# Altium PCB PCB.pcbdoc
Units mm, origin at the board's own origin, x right, y up, seen from the top; angles counter-clockwise.
Board outline 125.65 x 132.25 mm, 2 copper layers (Top Layer, Bottom Layer); 70 components, 68 nets, 266 pads, 45 vias.
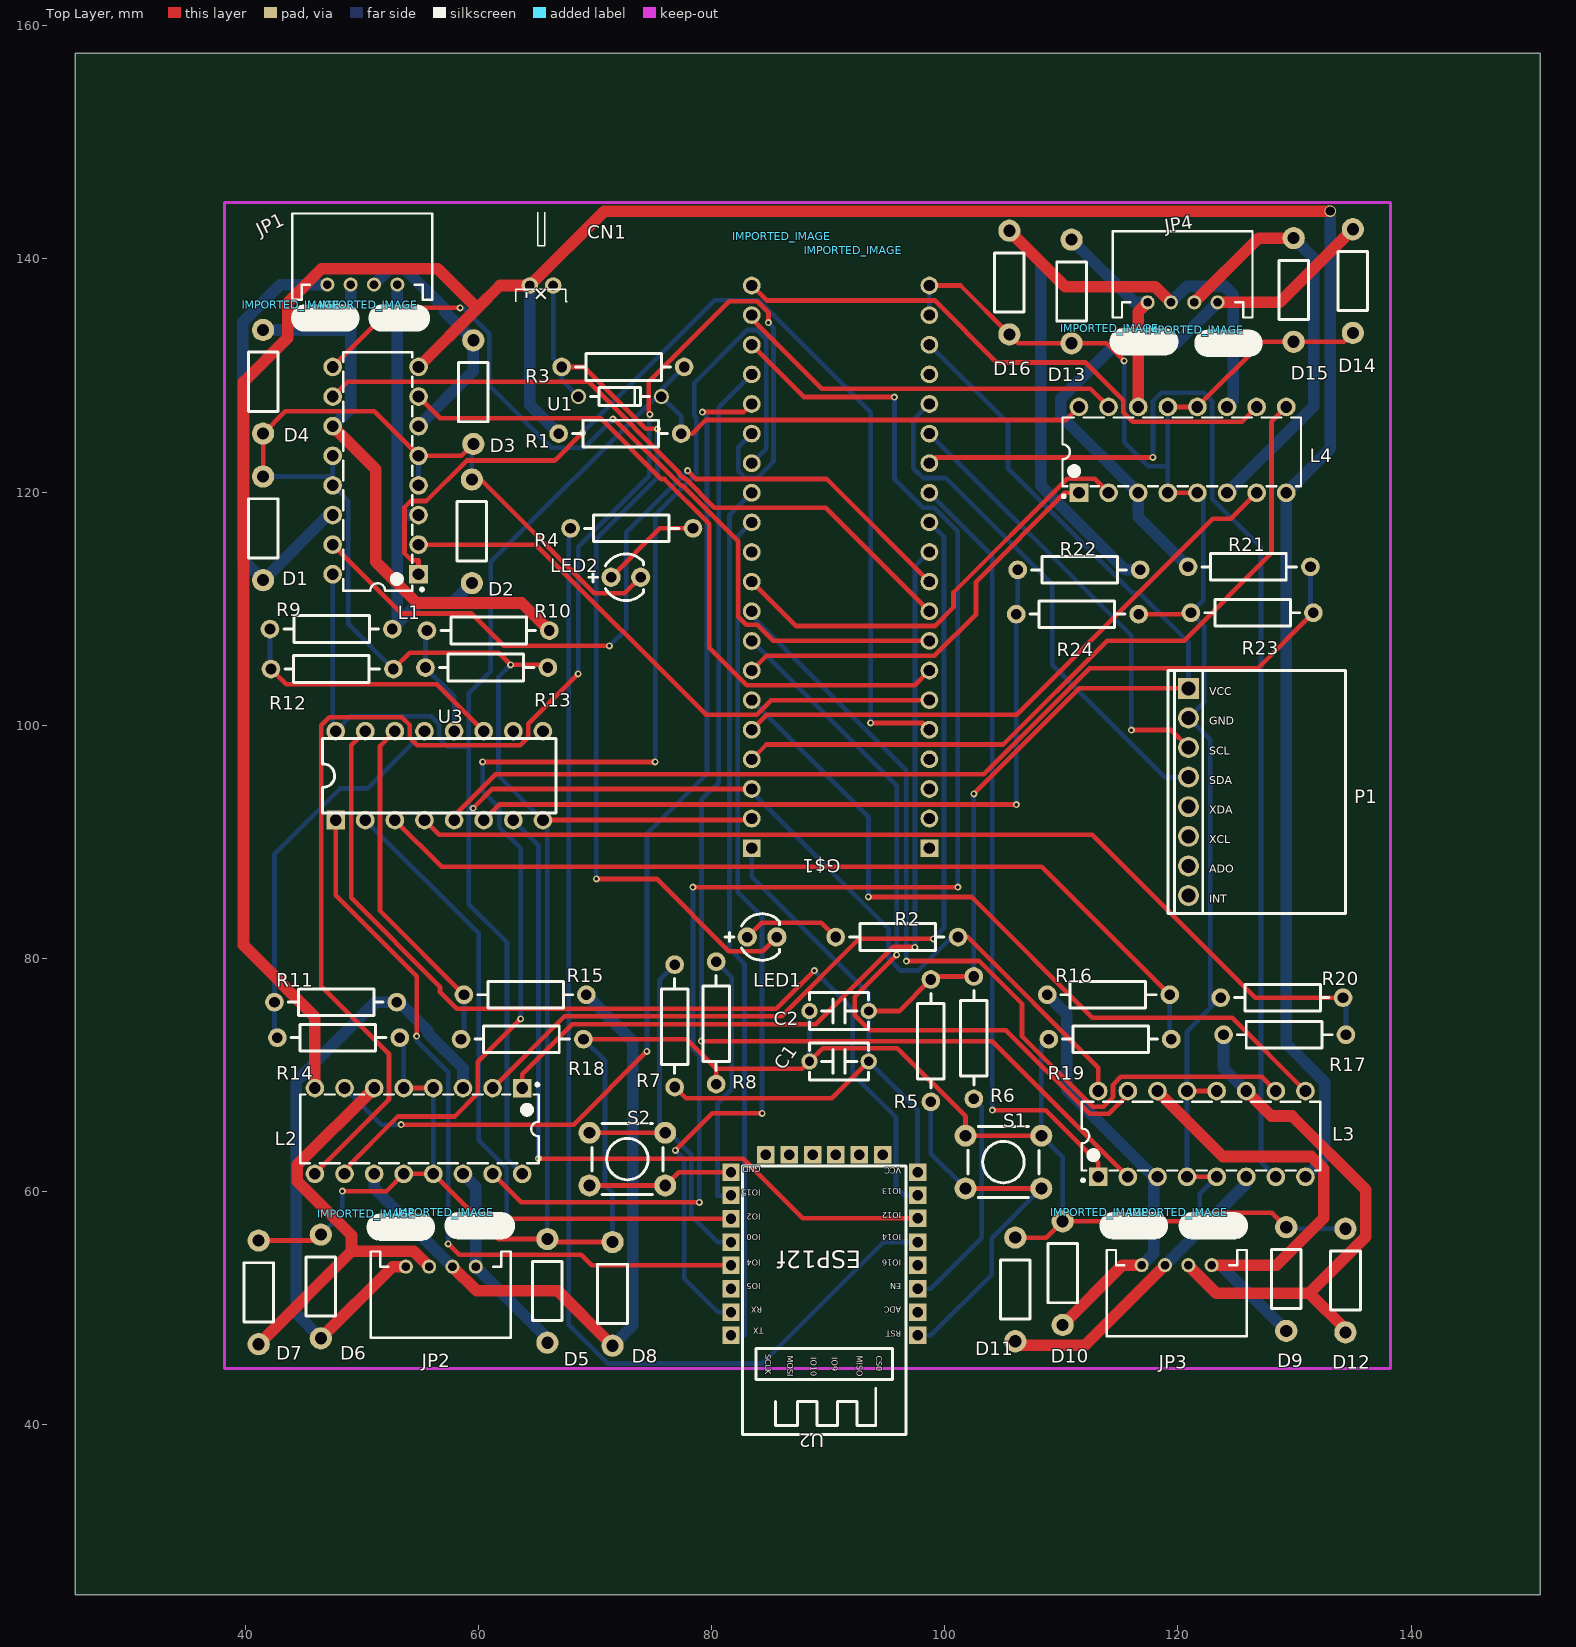
[diagram p0: Top Layer view]
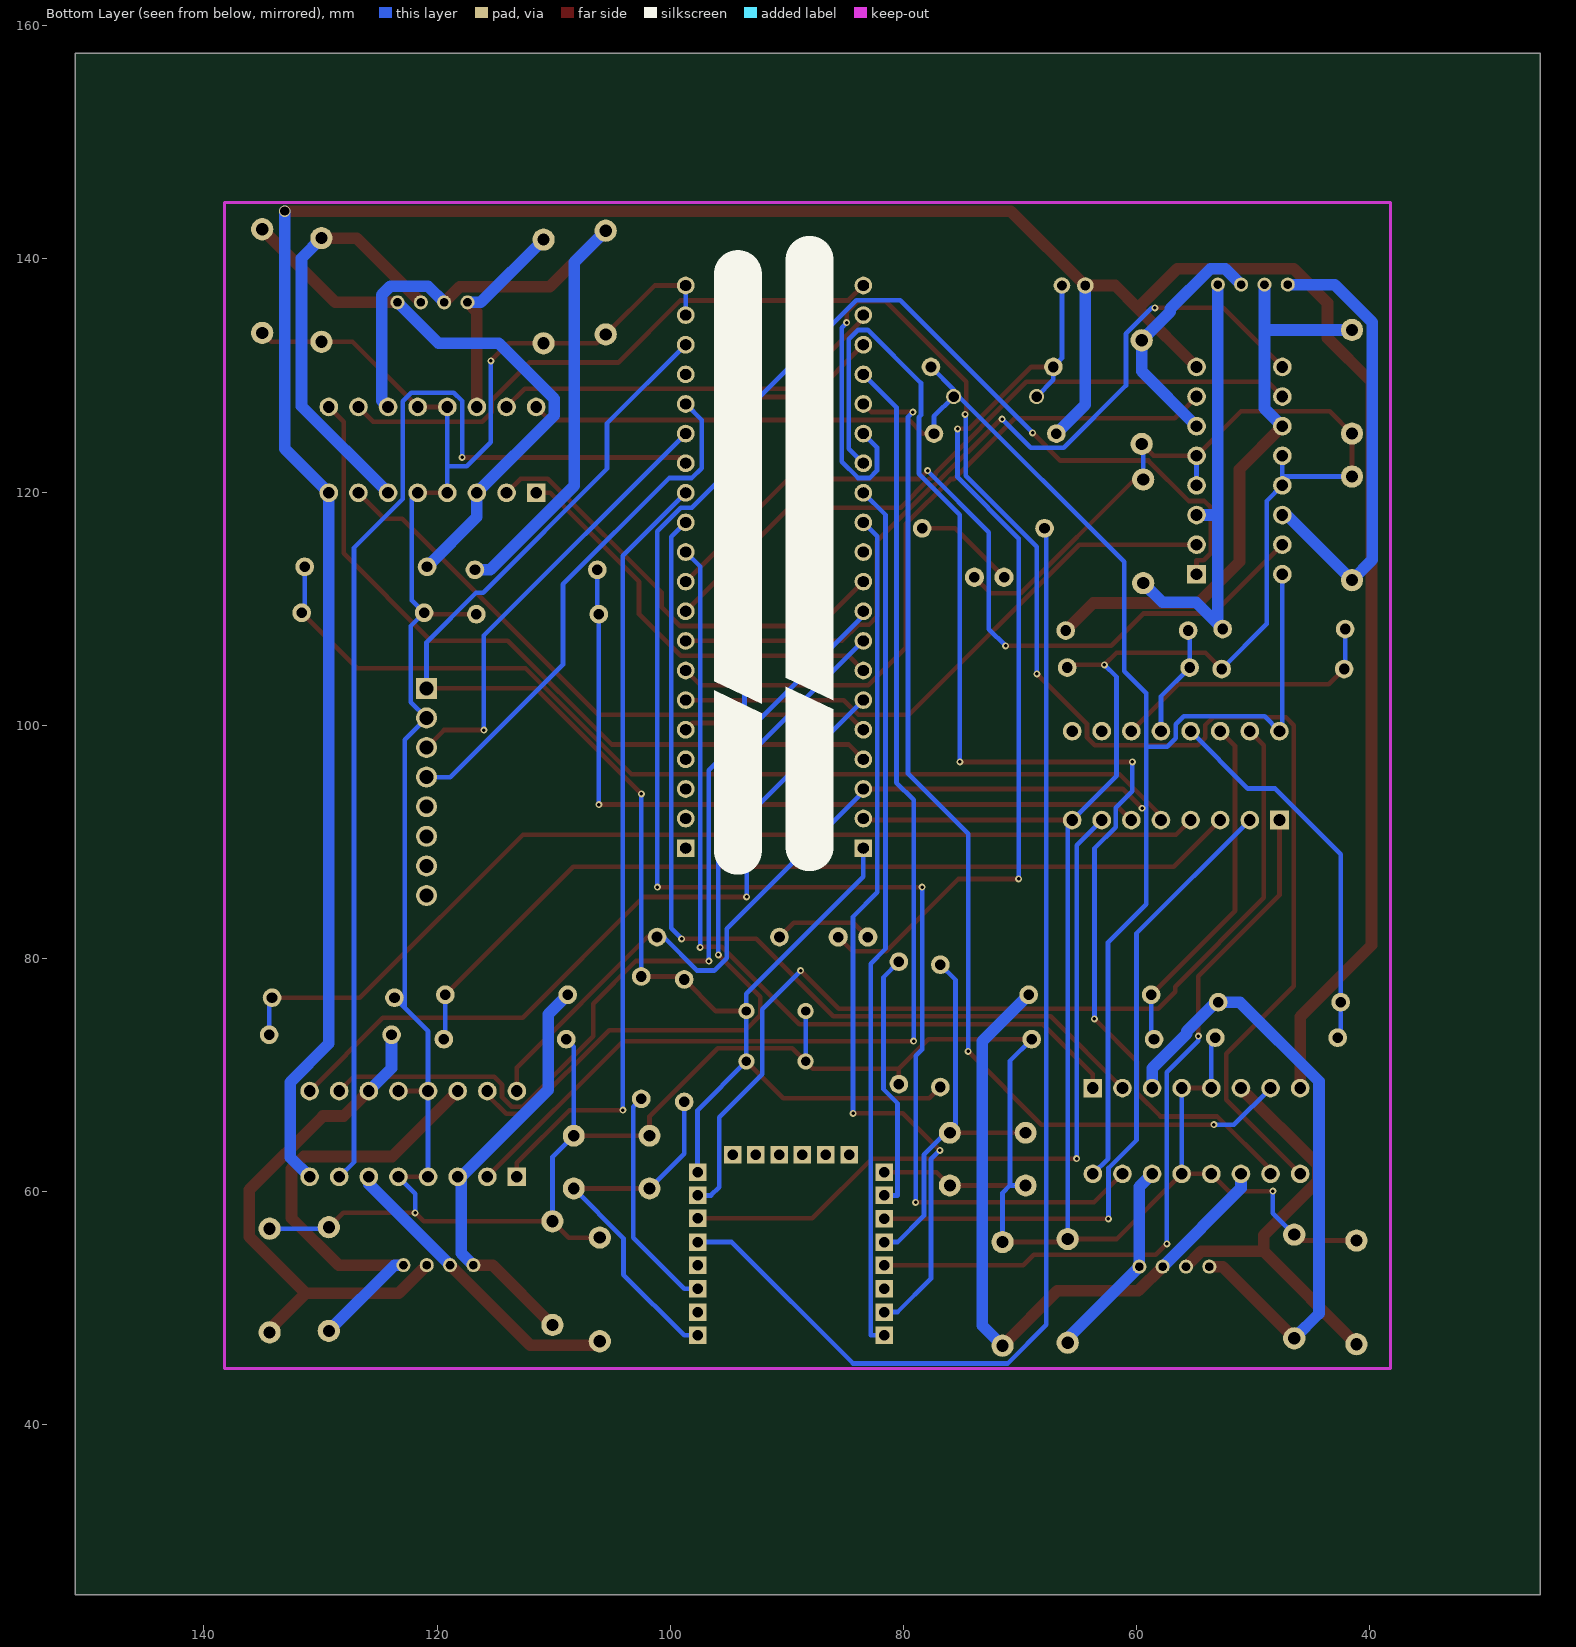
[diagram p1: Bottom Layer view, seen from below]

## Layer stack, top to bottom
Top Layer: signal copper (thickness not stored)
Dielectric: dielectric 0.32, FR-4, Dk 4.8
Bottom Layer: signal copper (thickness not stored)

## Board outline
151.054,25.4 25.4,25.4 25.4,157.651 151.054,157.651

## Components (designator, comment, footprint, x,y, rotation, side; value= is the part's Value field where it differs from the comment)
C1 "10uF" CAP-TH_L5.0-W2.5-P5.08-D0.7 90.932,71.164 r0 top
C2 "100nF" CAP-TH_L5.0-W2.5-P5.08-D0.7 90.932,75.482 r0 top
CN1 "JST_2PIN-THM-RA" JST-PH-2-THM-RA 65.405,137.712 r0 top
D1 "1N4001-G" SEEED-DO-41 41.529,116.884 r270 top
D2 "1N4001-G" SEEED-DO-41 59.436,116.63 r270 top
D3 "1N4001-G" SEEED-DO-41 59.563,128.568 r90 top
D4 "1N4001-G" SEEED-DO-41 41.529,129.457 r90 top
D5 "1N4001-G" SEEED-DO-41 65.913,51.479 r270 top
D6 "1N4001-G" SEEED-DO-41 46.482,51.86 r270 top
D7 "1N4001-G" SEEED-DO-41 41.148,51.352 r270 top
D8 "1N4001-G" SEEED-DO-41 71.501,51.225 r270 top
D9 "1N4001-G" SEEED-DO-41 129.286,52.495 r270 top
D10 "1N4001-G" SEEED-DO-41 110.109,53.003 r270 top
D11 "1N4001-G" SEEED-DO-41 106.045,51.606 r270 top
D12 "1N4001-G" SEEED-DO-41 134.366,52.368 r270 top
D13 "1N4001-G" SEEED-DO-41 110.871,137.204 r90 top
D14 "1N4001-G" SEEED-DO-41 135.001,138.093 r90 top
D15 "1N4001-G" SEEED-DO-41 129.921,137.331 r90 top
D16 "1N4001-G" SEEED-DO-41 105.537,137.966 r90 top
G$1 "BLUEPILL" BLUEPILL 98.679,89.452 r180 top
IMPORTED_IMAGE "IMPORTED_IMAGE" IMPORTED_IMAGE 92.166,140.725 r0 top
IMPORTED_IMAGE "IMPORTED_IMAGE" IMPORTED_IMAGE 86.022,141.946 r0 top
IMPORTED_IMAGE "IMPORTED_IMAGE" IMPORTED_IMAGE 114.15,134.029 r0 top
IMPORTED_IMAGE "IMPORTED_IMAGE" IMPORTED_IMAGE 121.423,133.902 r0 top
IMPORTED_IMAGE "IMPORTED_IMAGE" IMPORTED_IMAGE 120.078,58.21 r0 top
IMPORTED_IMAGE "IMPORTED_IMAGE" IMPORTED_IMAGE 113.287,58.21 r0 top
IMPORTED_IMAGE "IMPORTED_IMAGE" IMPORTED_IMAGE 57.107,58.21 r0 top
IMPORTED_IMAGE "IMPORTED_IMAGE" IMPORTED_IMAGE 50.429,58.083 r0 top
IMPORTED_IMAGE "IMPORTED_IMAGE" IMPORTED_IMAGE 43.951,136.061 r0 top
IMPORTED_IMAGE "IMPORTED_IMAGE" IMPORTED_IMAGE 50.597,136.061 r0 top
JP1 "M04JST-PTH" JST-4-PTH 50.038,142.792 r0 top
JP2 "M04JST-PTH" JST-4-PTH 56.769,48.558 r180 top
JP3 "M04JST-PTH" JST-4-PTH 119.888,48.685 r180 top
JP4 "M04JST-PTH" JST-4-PTH 120.396,141.268 r0 top
L1 "L293D" L293D 51.181,121.837 r90 top
L2 "L293D" L293D 54.864,65.195 r180 top
L3 "L293D" L293D 122.047,64.941 r0 top
L4 "L293D" L293D 120.396,123.615 r0 top
LED1 "204-10SUBC/C470/S400-A4" LED-TH_BD4.0-P2.54-FD 84.328,81.832 r0 top
LED2 "204-10SUBC/C470/S400-A4" LED-TH_BD4.0-P2.54-FD 72.644,112.693 r0 top
P1 "MPU6050" MPU6050 120.904,103.168 r270 top
R1 "1K" RES-TH_BD2.2-L6.5-P10.50-D0.6 72.136,125.012 r0 top
R2 "100" RES-TH_BD2.2-L6.5-P10.50-D0.6 95.885,81.832 r0 top
R3 "1.2K" RES-TH_BD2.2-L6.5-P10.50-D0.6 72.39,130.727 r0 top
R4 "100" RES-TH_BD2.2-L6.5-P10.50-D0.6 73.152,116.884 r180 top
R5 "1K" RES-TH_BD2.2-L6.5-P10.50-D0.6 98.806,72.942 r270 top
R6 "10K" RES-TH_BD2.2-L6.5-P10.50-D0.6 102.489,73.196 r270 top
R7 "10K" RES-TH_BD2.2-L6.5-P10.50-D0.6 76.835,74.212 r270 top
R8 "10K" RES-TH_BD2.2-L6.5-P10.50-D0.6 80.391,74.466 r270 top
R9 "150" RES-TH_BD2.2-L6.5-P10.50-D0.6 47.371,108.248 r0 top
R10 "150" RES-TH_BD2.2-L6.5-P10.50-D0.6 60.833,108.121 r0 top
R11 "150" RES-TH_BD2.2-L6.5-P10.50-D0.6 47.752,76.244 r0 top
R12 "51" RES-TH_BD2.2-L6.5-P10.50-D0.6 47.455,104.819 r180 top
R13 "51" RES-TH_BD2.2-L6.5-P10.50-D0.6 60.706,104.946 r180 top
R14 "51" RES-TH_BD2.2-L6.5-P10.50-D0.6 48.006,73.196 r180 top
R15 "150" RES-TH_BD2.2-L6.5-P10.50-D0.6 64.008,76.879 r0 top
R16 "150" RES-TH_BD2.2-L6.5-P10.50-D0.6 114.046,76.879 r180 top
R17 "150" RES-TH_BD2.2-L6.5-P10.50-D0.6 129.159,73.45 r180 top
R18 "51" RES-TH_BD2.2-L6.5-P10.50-D0.6 63.754,73.069 r180 top
R19 "51" RES-TH_BD2.2-L6.5-P10.50-D0.6 114.173,73.069 r0 top
R20 "51" RES-TH_BD2.2-L6.5-P10.50-D0.6 128.905,76.625 r0 top
R21 "150" RES-TH_BD2.2-L6.5-P10.50-D0.6 126.111,113.582 r180 top
R22 "150" RES-TH_BD2.2-L6.5-P10.50-D0.6 111.506,113.328 r0 top
R23 "51" RES-TH_BD2.2-L6.5-P10.50-D0.6 126.365,109.645 r0 top
R24 "51" RES-TH_BD2.2-L6.5-P10.50-D0.6 111.379,109.518 r180 top
S1 "TAC_SWITCH" TACTILE-PTH 105.029,62.528 r0 top
S2 "TAC_SWITCH" TACTILE-PTH 72.771,62.782 r0 top
U1 "DIODE-ZENER5V1" DIODE-ZENER 72.136,128.187 r180 top
U2 "ESP12f" ESP12F 89.662,55.416 r180 top
U3 "SN74HC165N" DIP-16_L19.8-W6.5-P2.54-LS7.6-BL 56.642,95.675 r0 top

## Footprints (in the part's own frame and the unit in brackets; to place one, negate y for a bottom-side part, rotate by r counter-clockwise, add the part's x,y. Pads: shape width x height; smd on the part's side, far side on the other; paste and mask are expansions set on the pad)
BLUEPILL [mil]
  rect 60x60 hole 36 slot 37.8 at 0 deg: P$1(0,0) P$40(600,0)
  round 60 hole 36 slot 37.8 at 0 deg: P$2(0,-100) P$3(0,-200) P$4(0,-300) P$5(0,-400) P$6(0,-500) P$7(0,-600) P$8(0,-700) P$9(0,-800) P$10(0,-900) P$11(0,-1000) P$12(0,-1100) P$13(0,-1200) P$14(0,-1300) P$15(0,-1400) P$16(0,-1500) P$17(0,-1600) P$18(0,-1700) P$19(0,-1800) P$20(0,-1900) P$21(600,-1900) P$22(600,-1800) P$23(600,-1700) P$24(600,-1600) P$25(600,-1500) P$26(600,-1400) P$27(600,-1300) P$28(600,-1200) P$29(600,-1100) P$30(600,-1000) P$31(600,-900) P$32(600,-800) P$33(600,-700) P$34(600,-600) P$35(600,-500) P$36(600,-400) P$37(600,-300) P$38(600,-200) P$39(600,-100)
CAP-TH_L5.0-W2.5-P5.08-D0.7 [mm]
  round 1.4 hole 0.8: 1(-2.54,0) 2(2.54,0)
  silkscreen extent -2.54,-1.59 2.54,1.59
DIODE-ZENER [mil]
  round 51.2 hole 35.4: P$1(-140,0) P$2(140,0)
  silkscreen extent -100,-30 100,30
DIP-16_L19.8-W6.5-P2.54-LS7.6-BL [mm]
  rect 1.6x1.6 hole 1: 1(-8.89,-3.81)
  round 1.6 hole 1: 2(-6.35,-3.81) 3(-3.81,-3.81) 4(-1.27,-3.81) 5(1.27,-3.81) 6(3.81,-3.81) 7(6.35,-3.81) 8(8.89,-3.81) 9(8.89,3.81) 10(6.35,3.81) 11(3.81,3.81) 12(1.27,3.81) 13(-1.27,3.81) 14(-3.81,3.81) 15(-6.35,3.81) 16(-8.89,3.81)
  silkscreen extent -10,-3.2 10,3.2
ESP12F [mm]
  rect 1.5x1.5 hole 0.899: 1(-8,7.75) 2(-8,5.75) 3(-8,3.75) 4(-8,1.75) 5(-8,-0.25) 6(-8.001,-2.286) 7(-8,-4.25) 8(-8,-6.25) 9(-5,-7.75) 10(-2.999,-7.75) 11(-1.001,-7.75) 12(1,-7.75) 13(3.001,-7.75) 14(5,-7.75) 15(8,-6.25) 16(8,-4.25) 17(8,-2.25) 18(8,-0.25) 19(8,1.75) 20(8,3.75) 21(8,5.75) 22(8,7.75)
  silkscreen extent -7,-6.76 7,16.25
IMPORTED_IMAGE [mm]
JST-4-PTH [mm]
  round 1.208 hole 0.7 slot 0.705 at 0 deg: 1(-3,-5) 2(-1,-5) 3(1,-5) 4(3,-5)
  silkscreen extent -6,-6.3 6,1.1
JST-PH-2-THM-RA [mil]
  round 56 hole 31.5 slot 31.7 at 0 deg: 1(39.37,0) 2(-39.37,0)
  silkscreen extent -87,-55 87,248
L293D [mm]
  rect 1.6x1.6 hole 1: 1(-8.89,-3.68)
  round 1.6 hole 1: 2(-6.35,-3.68) 3(-3.81,-3.68) 4(-1.27,-3.68) 5(1.27,-3.68) 6(3.81,-3.68) 7(6.35,-3.68) 8(8.89,-3.68) 9(8.89,3.68) 10(6.35,3.68) 11(3.81,3.68) 12(1.27,3.68) 13(-1.27,3.68) 14(-3.81,3.68) 15(-6.35,3.68) 16(-8.89,3.68)
  silkscreen extent -10.31,-4.1 10.16,2.77
LED-TH_BD4.0-P2.54-FD [mil]
  round 65 hole 35.43: 1(-50,0) 2(50,0)
  silkscreen extent -125,-79 59,79
MPU6050 [mm]
  rect 1.8x1.8 hole 1.2: 1(0,0)
  round 1.8 hole 1.2: 2(2.54,0) 3(5.08,0) 4(7.62,0) 5(10.16,0) 6(12.7,0) 7(15.24,0) 8(17.78,0)
  silkscreen extent -1.52,-1.78 19.3,13.46
RES-TH_BD2.2-L6.5-P10.50-D0.6 [mm]
  round 1.6 hole 0.914: 1(-5.25,0) 2(5.25,0)
  silkscreen extent -4.06,-1.14 4.06,1.14
SEEED-DO-41 [mil]
  round 75 hole 41: 1(-175,0) 2(175,0)
  silkscreen extent -100,-50 100,50
TACTILE-PTH [mil]
  round 74 hole 40: 1(-128,89) 2(128,89) 3(-128,-89) 4(128,-89)
  silkscreen extent -120,-120 120,120

## Via types
v1: diameter 0.6, hole 0.3, Top Layer to Bottom Layer, tented both sides, 44 vias
v2: diameter 1, hole 0.8, Top Layer to Bottom Layer, tented both sides, 1 vias

## Nets (pads, with @x,y where several pads share a name; then routed paths per layer and width w, separated by ;. In a path a pad name is that pad's centre, name@x,y a point inside that pad or via, vN(x,y) a via of type N, cw(c..) or ccw(c..) an arc to the next point about the centre after c; other vN are vias at no path point)
+3V3: C1.2 C2.2 G$1.P$18 G$1.P$40 P1.1 R5.1 R6.1 R7.2 U2.8 | length 139.1
  Top Layer w0.4: R7.2 77.805,67.993 90.301,67.993 C1.2 ; C2.2 96.096,75.482 R5.1 99.06,78.446 R6.1 ; v1(102.489,94.112) 111.546,103.168 P1.1
  Bottom Layer w0.4: G$1.P$40 83.439,87.003 93.472,76.97 C2.2 C1.2 97.662,66.974 U2.8 ; G$1.P$18 105.427,125.885 105.427,121.993 116.06,111.36 116.665,111.36 120.904,107.121 P1.1 ; R6.1 v1(102.489,94.112)
+5V: G$1.P$38 L1.16 L2.16 L3.16 L4.16 R1.2 R2.2 R3.2 U1.P$1 U3.16 | length 215.9
  Top Layer w0.4: v1(59.534,92.876) 61.19,94.532 G$1.P$38 ; R1.2 78.343,125.012 79.509,126.179 110.389,126.179 L4.16 ; R2.2 101.958,81.832 113.157,70.634 L3.16
  Bottom Layer w0.4: L1.16 47.501,99.736 U3.16 49.026,100.76 55.968,100.76 56.642,100.085 56.642,98.876 57.367,98.151 59.182,98.151 ; v1(59.534,92.876) 59.182,92.876 ; L2.16 63.754,61.528 62.45,62.832 62.45,81.384 59.182,84.652 59.182,92.876 ; R1.2 77.386,126.493 U1.P$1 ; R3.2 75.692,128.779 U1.P$1 ; G$1.P$38 83.439,94.285 95.171,82.553 95.171,80.005 96.219,78.957 97.702,78.957 100.578,81.832 R2.2 ; 59.182,92.876 59.182,98.151 ; 59.182,98.151 59.182,102.758 61.053,104.629 61.053,114.003 75.237,128.187 U1.P$1
+11V8: CN1.2 L1.8 L2.8 L3.8 L4.8 R1.1 | length 274.3
  Top Layer w1: L2.8 45.974,75.001 39.855,81.12 39.855,129.437 43.635,133.217 43.635,136.24 46.535,139.14 56.513,139.14 59.894,135.76 ; L1.8 59.894,135.76 ; v2(133.066,144.097) 70.79,144.097 CN1.2 61.846,137.712 59.894,135.76
  Bottom Layer w1: CN1.2 64.405,127.493 R1.1 ; L3.8 132.599,62.923 132.599,69.382 129.286,72.695 L4.8 133.066,123.715 v2(133.066,144.097)
CE: U2.7 U3.15 | length 83.7
  Top Layer w0.4: U3.15 49.083,98.276 49.083,85.193 56.696,77.58 56.696,77.134 58.152,75.678 85.552,75.678 v1(88.817,78.943)
  Bottom Layer w0.4: v1(88.817,78.943) 92.111,75.649 92.111,70.061 95.814,66.357 95.814,60.364 96.511,59.667 U2.7
CLK: U2.17 U3.2 | length 58.5
  Top Layer w0.4: v1(62.415,57.667) U2.17
  Bottom Layer w0.4: U3.2 60.013,82.144 60.013,64.419 62.415,62.017 v1(62.415,57.667)
GND: C1.1 C2.1 D1.1 D2.1 D3.1 D4.1 D5.1 D6.1 D7.1 D8.1 D9.1 D10.1 D11.1 D12.1 D13.1 D14.1 D15.1 D16.1 G$1.P$19 G$1.P$20 G$1.P$39 L1.4 L1.5 L1.12 L1.13 L2.4 L2.5 L2.12 L2.13 L3.4 L3.5 L3.12 L3.13 L4.4 L4.5 L4.12 L4.13 LED2.2 P1.2 R8.2 R12.1 R13.1 R14.1 R18.1 R19.1 R20.1 R23.1 R24.1 S1.1 S1.2 S2.3 S2.4 U2.15 U3.8 | length 478
  Top Layer w0.4: D7.1 45.974,55.797 D6.1 ; D1.1 D4.1 43.434,126.917 51.051,126.917 L1.5 58.547,123.107 D3.1 ; v1(48.32,60.034) 52.112,60.034 L2.12 L2.13 61.725,55.924 D5.1 66.167,55.67 D8.1 ; R12.1 54.096,106.21 61.729,106.21 v1(62.764,105.175) 65.728,105.175 R13.1 ; L2.5 L2.4 ; D2.1 60.182,121.075 69.951,111.306 72.527,111.306 LED2.2 ; U3.8 83.312,91.865 G$1.P$39 ; R18.1 77.865,73.069 80.391,70.544 ; S2.3 S2.4 77.167,61.667 U2.15 ; R8.2 80.391,70.544 ; G$1.P$20 101.346,137.712 D16.1 106.299,132.759 D13.1 113.867,132.759 v1(115.386,131.241) ; D11.1 108.712,56.051 D10.1 121.15,57.448 v1(121.876,58.174) 128.052,58.174 D9.1 ; S1.2 S1.1 101.778,66.459 95.934,72.303 89.531,72.303 C1.1 87.771,70.544 80.391,70.544 ; R24.1 120.988,109.518 R23.1 ; L4.4 L4.5 ; L4.13 L4.12 127.257,132.886 D15.1 134.239,132.886 D14.1 ; L3.4 L3.5 ; L3.13 L3.12
  Bottom Layer w0.4: D1.1 L1.13@47.501,121.329 ; D6.1 48.32,58.143 v1(48.32,60.034) ; L1.12 L1.13@47.501,121.329 ; R12.1 48.84,108.685 48.84,119.229 L1.13 L1.13@47.501,121.329 ; R14.1 53.594,72.858 L2.5 ; L1.4 L1.5 ; L2.13 L2.4 ; D2.1 59.436,123.996 D3.1 ; v1(62.764,105.175) 61.722,104.132 61.722,95.675 U3.8 65.913,91.484 D5.1 ; R18.1 70.861,71.212 70.861,60.522 ; S2.3 70.861,60.522 ; D8.1 71.501,59.882 70.861,60.522 ; C1.1 C2.1 ; G$1.P$19 G$1.P$20 ; R19.1 108.28,72.426 S1.2 110.109,62.96 D10.1 ; v1(115.386,131.241) 115.386,124.271 117.443,122.213 119.126,122.213 ; L4.4 119.126,122.213 ; L4.13 119.126,122.213 ; L3.4 L3.13 120.777,73.747 122.78,75.75 ; L4.5 122.168,119.433 122.168,110.698 R23.1 122.251,108.509 122.251,101.976 P1.2 122.78,98.752 122.78,75.75 ; v1(121.876,58.174) 121.876,59.82 L3.5 ; R20.1 122.78,75.75 ; D9.1 129.413,56.813 D12.1
LED2_1: LED2.1 R4.1 | length 8.8
  Top Layer w0.4: LED2.1 75.565,116.884 R4.1
M1_EN: G$1.P$5 L1.1 | length 89.8
  Top Layer w0.4: L1.1 54.861,114.148 54.26,114.148 53.656,114.752 53.656,118.693 54.192,119.229 55.519,119.229 58.989,122.698 66.542,122.698 v1(68.911,125.068) ; v1(93.637,100.194) 98.097,100.194 G$1.P$5
  Bottom Layer w0.4: v1(68.911,125.068) 80.286,136.442 84.043,136.442 93.637,126.848 v1(93.637,100.194)
M1_IN1: G$1.P$6 L1.2 | length 50.4
  Top Layer w0.4: L1.2 64.92,115.487 79.525,100.882 83.858,100.882 85.128,102.152 G$1.P$6
M1_IN2: G$1.P$7 L1.7 | length 60.8
  Top Layer w0.4: L1.7 56.727,126.321 70.473,126.321 75.681,121.113 75.958,121.113 79.809,117.262 79.81,106.627 83.014,103.422 97.409,103.422 G$1.P$7
M1_OUT_1: D2.2 JP1.4 L1.3 R9.2 | length 40
  Bottom Layer w1: JP1.4 53.038,118.027 ; L1.3 53.038,118.027 ; D2.2 57.785,110.534 54.907,110.534 R9.2 53.038,108.665 53.038,118.027
M1_OUT_2: D3.2 JP1.3 L1.6 | length 21.1
  Bottom Layer w1: JP1.3 52.396,139.15 53.661,139.15 57.105,135.706 57.105,135.471 D3.2 59.563,130.349 L1.6
M2_EN: G$1.P$8 L1.9 | length 73.5
  Top Layer w0.4: L1.9 52.575,135.801 v1(58.425,135.801) ; v1(71.527,126.258) 71.663,126.258 77.398,120.524 77.532,120.524 82.275,115.781 82.276,109.291 82.958,108.609 83.895,108.609 85.271,107.232 G$1.P$8
  Bottom Layer w0.4: v1(58.425,135.801) 58.691,135.801 60.917,133.575 60.917,129.139 66.245,123.811 69.079,123.811 v1(71.527,126.258)
M2_IN1: G$1.P$9 L1.10 | length 59.9
  Top Layer w0.4: L1.10 48.771,129.457 69.45,129.457 77.236,121.671 77.236,121.536 77.647,121.125 77.781,121.125 80.244,118.663 89.788,118.663 G$1.P$9
M2_IN2: G$1.P$10 L1.15 | length 69.8
  Top Layer w0.4: L1.15 53.413,109.575 59.419,109.575 62.182,106.813 v1(71.238,106.813) ; v1(77.937,121.826) 78.646,121.118 89.874,121.118 G$1.P$10
  Bottom Layer w0.4: v1(71.238,106.813) 72.673,108.247 72.673,116.562 v1(77.937,121.826)
M2_OUT_1: D4.2 JP1.2 L1.11 R10.2 | length 50.8
  Top Layer w1: L1.11 51.182,121.967 51.182,114.021 54.725,110.477 63.727,110.477 R10.2
  Bottom Layer w1: D4.2 49.038,133.902 ; L1.11 49.038,127.184 49.038,133.902 ; JP1.2 49.038,133.902
M2_OUT_2: D1.2 JP1.1 L1.14 | length 39.7
  Bottom Layer w1: JP1.1 43.004,137.792 39.783,134.571 39.783,114.185 D1.2 47.117,118.027 L1.14
M3_EN: G$1.P$11 L2.1 | length 73.9
  Top Layer w0.4: L2.1 63.754,70.076 68.038,74.36 88.945,74.36 95.582,80.997 97.383,80.997 v1(97.438,80.942)
  Bottom Layer w0.4: v1(97.438,80.942) 97.438,113.611 G$1.P$11
M3_IN1: G$1.P$12 L2.2 | length 79.7
  Top Layer w0.4: L2.2 67.383,75.044 86.003,75.044 92.641,81.682 v1(99.022,81.682)
  Bottom Layer w0.4: G$1.P$12 99.926,116.145 99.926,82.586 v1(99.022,81.682)
M3_IN2: G$1.P$25 L2.7 | length 91.5
  Top Layer w0.4: v1(53.369,65.737) 68.165,65.737 v1(74.451,72.023) ; v1(79.202,126.863) 82.749,126.863 G$1.P$25
  Bottom Layer w0.4: L2.7 51.652,65.737 v1(53.369,65.737) ; v1(74.451,72.023) 74.451,90.691 79.604,95.844 79.604,126.46 v1(79.202,126.863)
M3_OUT_1: D6.2 JP2.4 L2.3 R11.2 | length 54.1
  Top Layer w1: D6.2 52.625,53.558 JP2.4
  Bottom Layer w1: D6.2 44.359,49.538 44.359,69.463 51.141,76.244 R11.2 53.22,76.244 55.708,73.756 55.708,73.538 58.674,70.572 L2.3
M3_OUT_2: D7.2 JP2.3 L2.6 | length 37.1
  Top Layer w1: D7.2 49.108,54.868 ; L2.6 44.47,62.291 44.47,60.883 49.108,56.245 49.108,54.868 ; JP2.3 54.46,54.868 49.108,54.868
M4_EN: G$1.P$26 L2.9 | length 132.4
  Top Layer w0.4: L2.9 52.325,67.866 52.325,71.807 46.512,77.619 46.512,100.01 47.189,100.687 53.433,100.687 54.102,100.018 54.102,98.934 54.752,98.284 63.593,98.284 64.262,98.953 64.262,100.108 v1(68.56,104.406) ; v1(74.709,126.667) 74.604,126.773 74.604,129.464 81.509,136.369 83.909,136.369 84.872,135.407 v1(84.872,134.528)
  Bottom Layer w0.4: v1(68.56,104.406) 68.56,115.304 74.659,121.404 74.659,126.618 v1(74.709,126.667) ; G$1.P$26 82.273,123.846 82.273,121.834 82.904,121.202 83.895,121.202 85.305,122.612 85.305,134.095 v1(84.872,134.528)
M4_IN1: G$1.P$27 L2.10 | length 114.1
  Top Layer w0.4: L2.10 48.514,61.874 53.078,66.439 57.95,66.439 59.945,68.433 59.945,71.135 v1(63.615,74.806) ; v1(60.369,96.849) v1(75.159,96.849)
  Bottom Layer w0.4: v1(60.369,96.849) 60.369,94.33 61.79,92.908 61.79,91.264 63.615,89.44 v1(63.615,74.806) ; v1(75.159,96.849) 75.159,118.056 78.671,121.568 78.671,126.402 78.5,126.572 78.5,129.352 83.05,133.902 83.878,133.902 84.685,133.095 84.685,123.718 G$1.P$27
M4_IN2: G$1.P$23 L2.15 | length 127.7
  Top Layer w0.4: L2.15 63.656,59.073 v1(78.947,59.073) ; v1(78.402,86.106) v1(101.115,86.106) ; G$1.P$23 87.927,128.144 v1(95.682,128.144)
  Bottom Layer w0.4: v1(78.402,86.106) 78.402,72.188 78.947,71.644 v1(78.947,59.073) ; v1(95.682,128.144) 95.682,121.12 98.14,118.662 99.098,118.662 101.115,116.645 v1(101.115,86.106)
M4_OUT_1: D8.2 JP2.2 L2.11 R15.2 | length 59.7
  Top Layer w1: JP2.2 59.848,51.479 66.802,51.479 D8.2
  Bottom Layer w1: L2.11 51.054,60.273 JP2.2 ; R15.2 73.236,72.901 73.236,48.515 D8.2
M4_OUT_2: D5.2 JP2.1 L2.14 | length 17.5
  Bottom Layer w1: L2.14 59.769,60.42 JP2.1 65.913,47.414 D5.2
M5_EN: G$1.P$13 L3.1 | length 67.3
  Top Layer w0.4: v1(104.075,66.975) 108.644,66.975 113.157,62.462 L3.1
  Bottom Layer w0.4: G$1.P$13 104.075,114.536 v1(104.075,66.975)
M5_IN1: G$1.P$24 L3.2 | length 100.4
  Top Layer w0.4: v1(79.129,72.905) 104.054,72.905 L3.2
  Bottom Layer w0.4: v1(79.129,72.905) 79.129,93.61 80.6,95.081 80.6,127.253 G$1.P$24
M5_IN2: G$1.P$14 L3.7 | length 98.7
  Top Layer w0.4: G$1.P$14 99.169,122.962 v1(117.857,122.962)
  Bottom Layer w0.4: v1(117.857,122.962) 117.857,127.809 118.563,128.515 122.205,128.515 122.937,127.784 122.937,119.404 127.128,115.212 127.128,62.53 L3.7
M5_OUT_1: D10.2 JP3.4 L3.3 R16.2 | length 36.6
  Top Layer w1: D10.2 115.236,53.685 JP3.4
  Bottom Layer w1: R16.2 110.466,75.209 110.466,68.715 L3.3@117.921,61.261 ; JP3.4 117.921,54.718 L3.3@117.921,61.261 ; L3.3 L3.3@117.921,61.261
M5_OUT_2: D11.2 JP3.3 L3.6 | length 26.3
  Top Layer w1: D11.2 106.385,46.822 112.024,46.822 JP3.3
  Bottom Layer w1: JP3.3 125.857,60.654 L3.6
M6_EN: G$1.P$35 L3.9 | length 65.4
  Top Layer w0.4: v1(93.45,85.266) 102.304,85.266 112.659,74.911 124.647,74.911 L3.9
  Bottom Layer w0.4: G$1.P$35 93.45,92.141 v1(93.45,85.266)
M6_IN1: G$1.P$32 L3.10 | length 76.2
  Top Layer w0.4: v1(96.7,79.773) 102.967,79.773 106.619,76.12 106.619,73.329 112.676,67.272 113.612,67.272 114.428,68.087 114.428,69.172 115.104,69.848 127.17,69.848 L3.10
  Bottom Layer w0.4: G$1.P$32 83.439,109.4 96.7,96.139 v1(96.7,79.773)
M6_IN2: G$1.P$33 L3.15 | length 66.7
  Top Layer w0.4: v1(95.872,80.295) 92.29,76.713 92.29,75.105 93.546,73.849 105.243,73.849 112.43,66.663 114.079,66.663 115.697,68.28 L3.15
  Bottom Layer w0.4: G$1.P$33 95.872,94.799 v1(95.872,80.295)
M6_OUT_1: D12.2 JP3.2 L3.11 R17.2 | length 46.3
  Top Layer w1: JP3.2 123.299,51.274 131.274,51.274 ; L3.11 127.999,66.479 129.78,66.479 136.115,60.145 136.115,56.115 131.274,51.274 ; D12.2 134.366,48.182 131.274,51.274
  Bottom Layer w1: R17.2 123.909,70.569 L3.11
M6_OUT_2: D9.2 JP3.1 L3.14 | length 41.2
  Top Layer w1: L3.14 123.855,63.003 131.435,63.003 132.495,61.943 132.495,57.733 128.447,53.685 JP3.1
  Bottom Layer w1: JP3.1 123.651,53.685 D9.2
M7_EN: G$1.P$34 L4.1 | length 36
  Top Layer w0.4: G$1.P$34 84.709,105.962 99.112,105.962 102.679,109.529 102.679,112.309 110.305,119.935 L4.1
M7_IN1: G$1.P$31 L4.2 | length 38.7
  Top Layer w0.4: G$1.P$31 87.249,108.502 99.145,108.502 100.748,110.105 100.748,111.384 110.501,121.137 112.844,121.137 L4.2
M7_IN2: G$1.P$36 L4.7 | length 51.7
  Top Layer w0.4: G$1.P$36 84.726,100.899 106.169,100.899 122.984,117.715 124.526,117.715 L4.7
M7_OUT_1: D14.2 JP4.4 L4.3 R21.2 | length 51.1
  Top Layer w1: JP4.4 128.731,136.268 D14.2
  Bottom Layer w1: L4.3 116.586,118.896 ; R21.2 116.586,117.857 116.586,118.896 ; JP4.4 119.877,132.749 114.701,132.749 109.947,127.996 109.947,126.565 116.586,119.926 116.586,118.896
M7_OUT_2: D15.2 JP4.3 L4.6 | length 36.4
  Top Layer w1: JP4.3 126.904,141.776 D15.2
  Bottom Layer w1: L4.6 131.634,127.363 131.634,140.063 D15.2
M8_EN: G$1.P$37 L4.9 | length 65
  Top Layer w0.4: G$1.P$37 84.709,98.342 105.015,98.342 113.927,107.254 120.527,107.254 128.017,114.744 128.017,126.026 L4.9
M8_IN1: G$1.P$21 L4.10 | length 49.3
  Top Layer w0.4: G$1.P$21 84.719,136.432 99.123,136.432 104.452,131.104 112.093,131.104 115.317,127.88 115.317,126.853 116.129,126.041 125.491,126.041 L4.10
M8_IN2: G$1.P$22 L4.15 | length 34.1
  Top Layer w0.4: G$1.P$22 83.439,134.849 89.443,128.845 112.496,128.845 L4.15
M8_OUT_1: D16.2 JP4.2 L4.11 R22.2 | length 67
  Top Layer w1: D16.2 110.34,137.608 118.056,137.608 JP4.2
  Bottom Layer w1: D16.2 108.242,139.706 108.242,120.53 115.444,113.328 R22.2 ; JP4.2 120.782,137.654 124.003,137.654 124.752,136.905 124.752,127.841 L4.11
M8_OUT_2: D13.2 JP4.1 L4.14 | length 18.1
  Top Layer w1: L4.14 116.586,135.458 JP4.1
  Bottom Layer w1: D13.2 116.252,136.268 JP4.1
MCU_RX: G$1.P$28 U2.22 | length 74.7
  Bottom Layer w0.4: U2.22 82.813,47.667 82.814,47.668 82.814,79.543 81.538,80.819 81.538,118.032 G$1.P$28
MCU_TX: G$1.P$29 U2.21 | length 77.3
  Top Layer w0.4: v1(76.885,63.532) 80.066,66.714 v1(84.328,66.714)
  Bottom Layer w0.4: v1(76.885,63.532) 77.644,62.773 77.644,52.534 80.511,49.667 U2.21 ; G$1.P$29 82.235,116.188 82.235,85.666 84.328,83.573 v1(84.328,66.714)
R2_1: LED1.1 R2.1 | length 8.6
  Top Layer w0.4: LED1.1 84.289,83.063 89.404,83.063 R2.1
R3_1: CN1.1 LED1.2 R3.1 U1.P$2 | length 80.2
  Top Layer w0.4: R3.1 69.03,130.727 74.34,125.417 v1(75.361,125.417) ; v1(70.117,86.811) 75.28,86.811 81.488,80.603 84.369,80.603 LED1.2
  Bottom Layer w0.4: CN1.1 66.405,131.462 R3.1 67.14,129.627 U1.P$2 ; v1(70.117,86.811) 70.117,116.01 75.361,121.255 v1(75.361,125.417)
R6_2: R6.2 U2.3 | length 19.5
  Bottom Layer w0.4: U2.3 98.813,51.667 103.17,56.024 103.17,67.265 R6.2
R8_1: R8.1 U2.16 | length 22.2
  Bottom Layer w0.4: R8.1 81.714,78.394 81.714,68.791 80.511,67.588 80.511,59.667 ; 80.511,59.667 U2.16
S1_3: R5.2 S1.3 S1.4 U2.1 | length 32.8
  Top Layer w0.4: S1.3 S1.4
  Bottom Layer w0.4: U2.1 98.813,47.667 104.019,52.873 104.019,56.006 S1.4 ; R5.2 98.806,63.239 S1.3
S2_1: R7.1 S2.1 S2.2 U2.18 | length 34.2
  Top Layer w0.4: S2.1 S2.2
  Bottom Layer w0.4: R7.1 75.536,78.163 75.536,65.529 S2.2 76.366,65.043 78.245,63.163 78.245,57.933 80.511,55.667 U2.18
SCL: G$1.P$15 P1.3 | length 38.1
  Top Layer w0.4: v1(115.995,99.581) 119.411,99.581 P1.3
  Bottom Layer w0.4: G$1.P$15 115.995,107.696 v1(115.995,99.581)
SDA: G$1.P$16 P1.4 | length 44.7
  Bottom Layer w0.4: G$1.P$16 97.303,126.176 97.303,122.057 98.157,121.202 100.082,121.202 109.205,112.079 109.205,105.203 118.86,95.548 P1.4
SH: U2.19 U3.1 | length 65.4
  Top Layer w0.4: U3.1 47.752,85.415 54.707,78.46 v1(54.707,73.34) ; v1(57.405,55.516) 58.35,54.57 68.812,54.57 69.716,53.667 U2.19
  Bottom Layer w0.4: v1(54.707,73.34) 54.707,72.934 57.405,70.236 v1(57.405,55.516)
STATUS: R4.2 U2.5 | length 104
  Bottom Layer w0.4: R4.2 67.752,116.734 67.752,48.571 71.072,45.251 84.324,45.251 94.74,55.667 U2.5
V_M1: R9.1 R12.2 U3.11 | length 23.9
  Top Layer w0.4: R12.2 43.512,103.512 56.425,103.512 U3.11
  Bottom Layer w0.4: R9.1 42.121,104.903 R12.2
V_M2: R10.1 R13.2 U3.12 | length 9.7
  Bottom Layer w0.4: R10.1 55.456,107.994 R13.2 57.912,102.49 U3.12
V_M3: R11.1 R14.2 U3.13 | length 33.1
  Bottom Layer w0.4: R14.2 42.502,73.45 R11.1 42.502,88.941 48.125,94.564 50.451,94.564 U3.13
V_M4: R15.1 R18.2 U3.14 | length 30
  Top Layer w0.4: U3.14 51.557,98.21 51.557,84.08 R15.1
  Bottom Layer w0.4: R18.2 58.758,73.323 R15.1
V_M5: R16.1 R19.2 U3.3 | length 76.5
  Top Layer w0.4: U3.3 56.834,87.864 108.312,87.864 R16.1
  Bottom Layer w0.4: R16.1 119.296,73.196 R19.2
V_M6: R17.1 R20.2 U3.4 | length 88.4
  Top Layer w0.4: U3.4 56.621,90.616 112.634,90.616 126.625,76.625 R20.2
  Bottom Layer w0.4: R20.2 134.409,76.371 R17.1
V_M7: R21.1 R23.2 U3.5 | length 85.3
  Top Layer w0.4: U3.5 57.912,92.246 61.467,95.801 103.325,95.801 112.418,104.895 126.865,104.895 R23.2
  Bottom Layer w0.4: R21.1 131.361,109.899 R23.2
V_M8: R22.1 R24.2 U3.6 | length 66.4
  Top Layer w0.4: U3.6 61.782,93.196 v1(106.129,93.196)
  Bottom Layer w0.4: v1(106.129,93.196) R24.2 106.256,109.645 R22.1
V_READINGS: U2.6 U3.7 | length 64.6
  Top Layer w0.4: v1(65.147,62.818) 82.697,62.818 87.812,57.702 U2.6@97.663,57.702
  Bottom Layer w0.4: U3.7 65.147,89.711 v1(65.147,62.818)
pads on no net: G$1.P$1 G$1.P$2 G$1.P$3 G$1.P$4 G$1.P$17 G$1.P$30 P1.5 P1.6 P1.7 P1.8 U2.2 U2.4 U2.9 U2.10 U2.11 U2.12 U2.13 U2.14 U2.20 U3.9 U3.10

## Text inside footprints (layer, text, board x,y; h text height)
CN1: Top Overlay "+" at 66.394,136.83 h1.42 r135; Top Overlay "-" at 64.687,136.527 h1.42 r90
JP1: Document "+" at 46.189,139.576 h1.27 r225; Document "-" at 49.273,139.127 h1.27 r90; Document "S" at 50.738,139.492 h0.8 r180; Document "S" at 54.102,139.763 h0.8 r180
JP2: Document "+" at 60.618,51.774 h1.27 r45; Document "-" at 57.534,52.223 h1.27 r270; Document "S" at 56.069,51.858 h0.8; Document "S" at 54.069,51.858 h0.8
JP3: Document "+" at 123.737,51.901 h1.27 r45; Document "-" at 120.653,52.35 h1.27 r270; Document "S" at 119.188,51.985 h0.8; Document "S" at 117.188,51.985 h0.8
JP4: Document "+" at 116.547,138.052 h1.27 r225; Document "-" at 119.631,137.603 h1.27 r90; Document "S" at 120.269,139.128 h0.8 r180; Document "S" at 123.096,137.968 h0.8 r180
P1: Top Overlay "VCC" at 122.682,102.564 h0.7; Top Overlay "GND" at 122.682,100.024 h0.7; Top Overlay "SCL" at 122.682,97.484 h0.7; Top Overlay "SDA" at 122.682,94.944 h0.7; Top Overlay "XDA" at 122.682,92.404 h0.7; Top Overlay "XCL" at 122.682,89.864 h0.7; Top Overlay "ADO" at 122.682,87.324 h0.7; Top Overlay "INT" at 122.682,84.784 h0.7
U2: Top Overlay "RST" at 96.265,48.073 h0.5 r180; Top Overlay "VCC" at 96.265,62.043 h0.5 r180; Top Overlay "GND" at 84.2,62.17 h0.5 r180; Top Overlay "RX" at 84.327,50.105 h0.5 r180; Top Overlay "TX" at 84.454,48.327 h0.5 r180; Top Overlay "SCLK" at 84.585,46.045 h0.5 r270; Top Overlay "MOSI" at 86.49,45.918 h0.5 r270; Top Overlay "IO10" at 88.522,45.791 h0.5 r270; Top Overlay "IO9" at 90.3,45.791 h0.5 r270; Top Overlay "MISO" at 92.459,45.918 h0.5 r270; Top Overlay "CS0" at 94.11,45.918 h0.5 r270; Top Overlay "IO15" at 84.2,60.138 h0.5 r180; Top Overlay "IO2" at 84.2,58.106 h0.5 r180; Top Overlay "IO0" at 84.2,56.328 h0.5 r180; Top Overlay "IO4" at 84.2,54.169 h0.5 r180; Top Overlay "IO5" at 84.2,52.137 h0.5 r180; Top Overlay "EN" at 96.265,52.137 h0.5 r180; Top Overlay "IO13" at 96.265,60.265 h0.5 r180; Top Overlay "IO12" at 96.265,58.233 h0.5 r180; Top Overlay "IO14" at 96.265,56.328 h0.5 r180; Top Overlay "IO16" at 96.265,54.169 h0.5 r180; Top Overlay "ADC" at 96.265,50.105 h0.5 r180